# Altium PCB all.PcbDoc
Units mil, origin at the board's own origin, x right, y up, seen from the top; angles counter-clockwise.
Board outline 2164.03 x 2479.49 mil, 2 copper layers (Top Layer, Bottom Layer); 19 components, 43 nets, 160 pads, 23 vias.
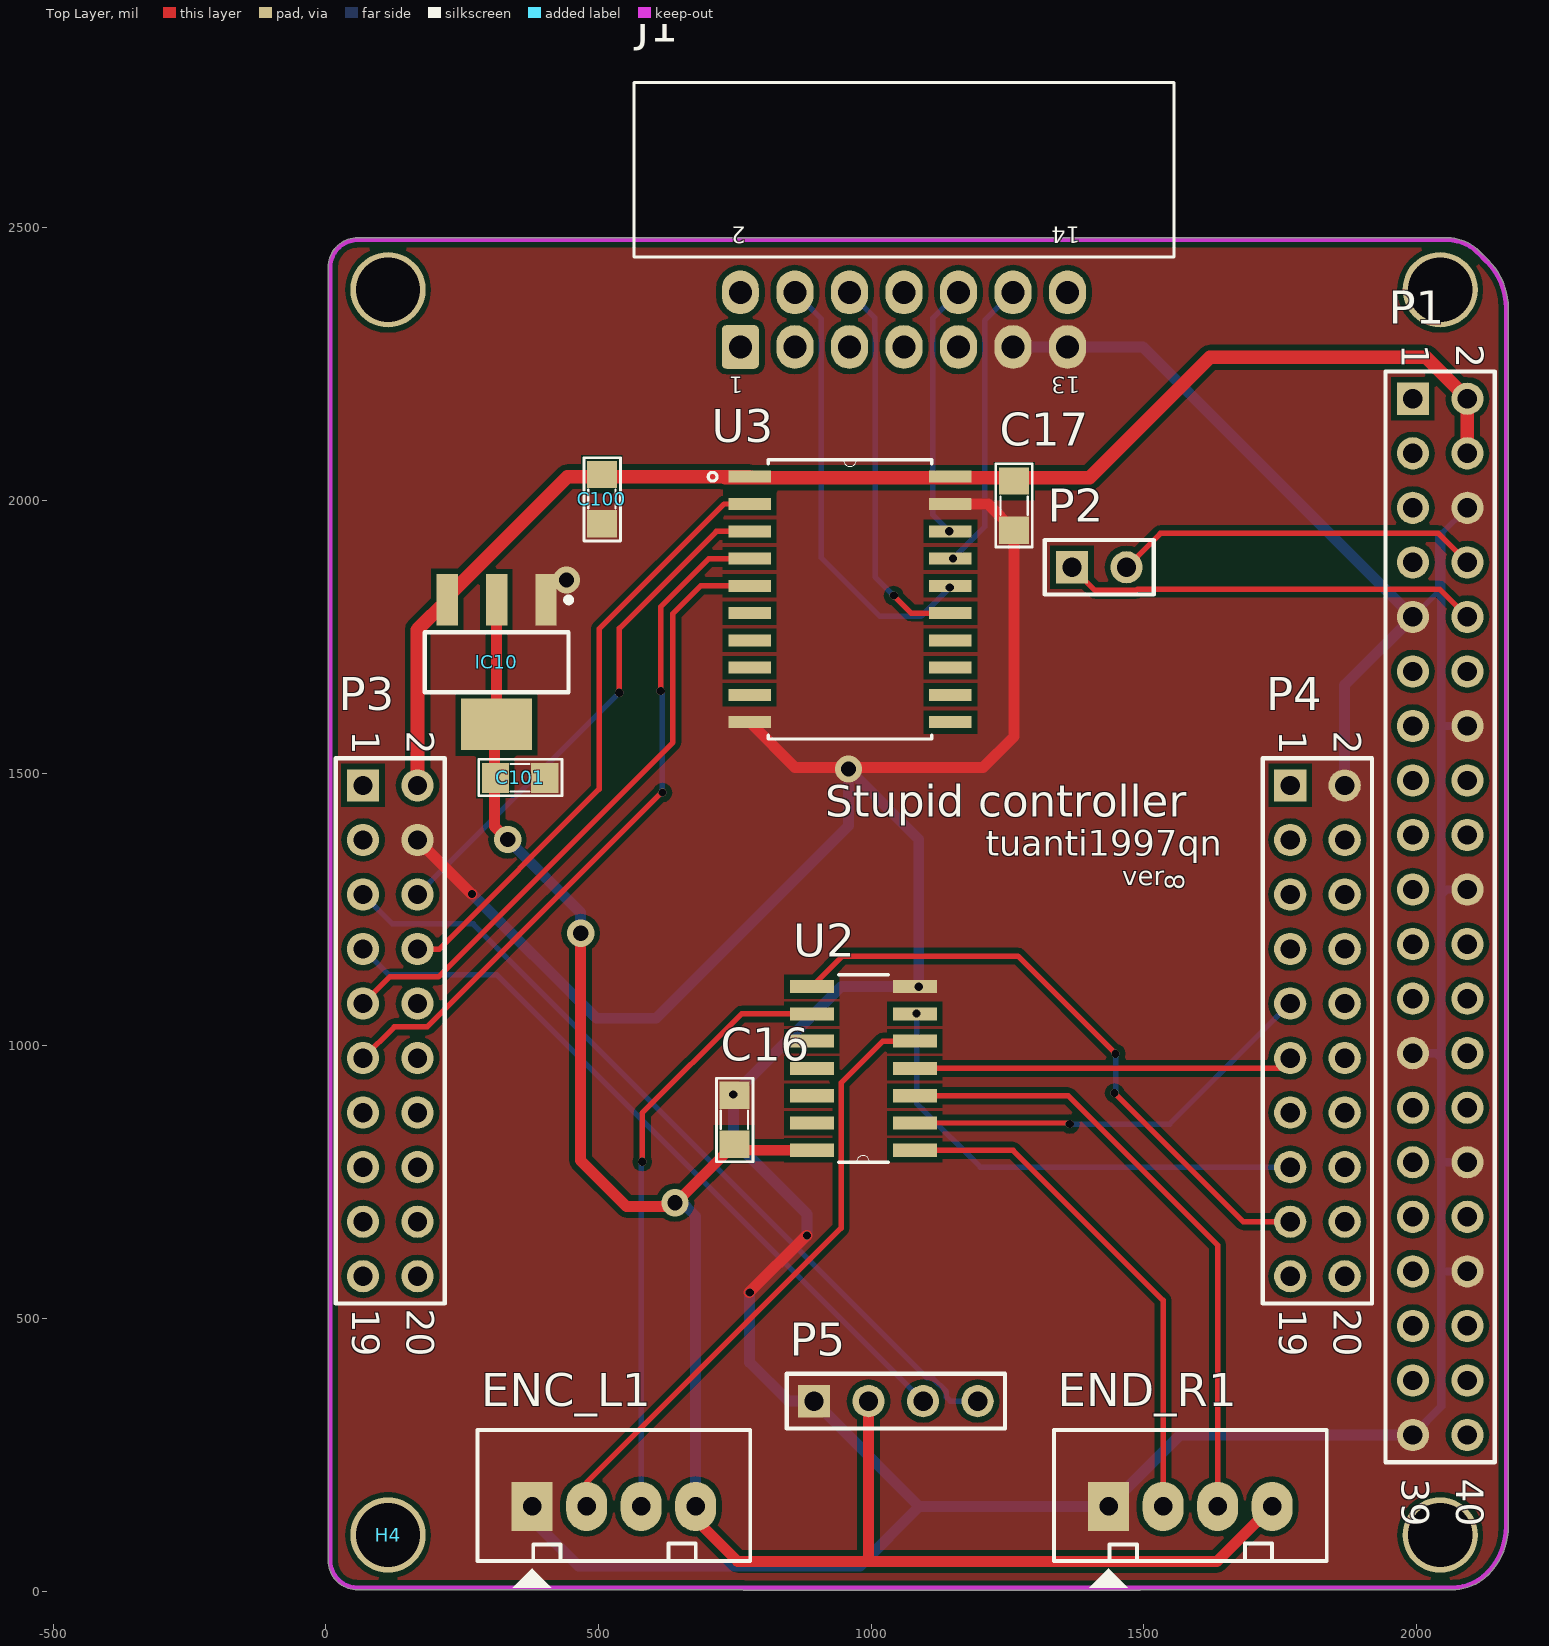
[diagram p0: Top Layer view]
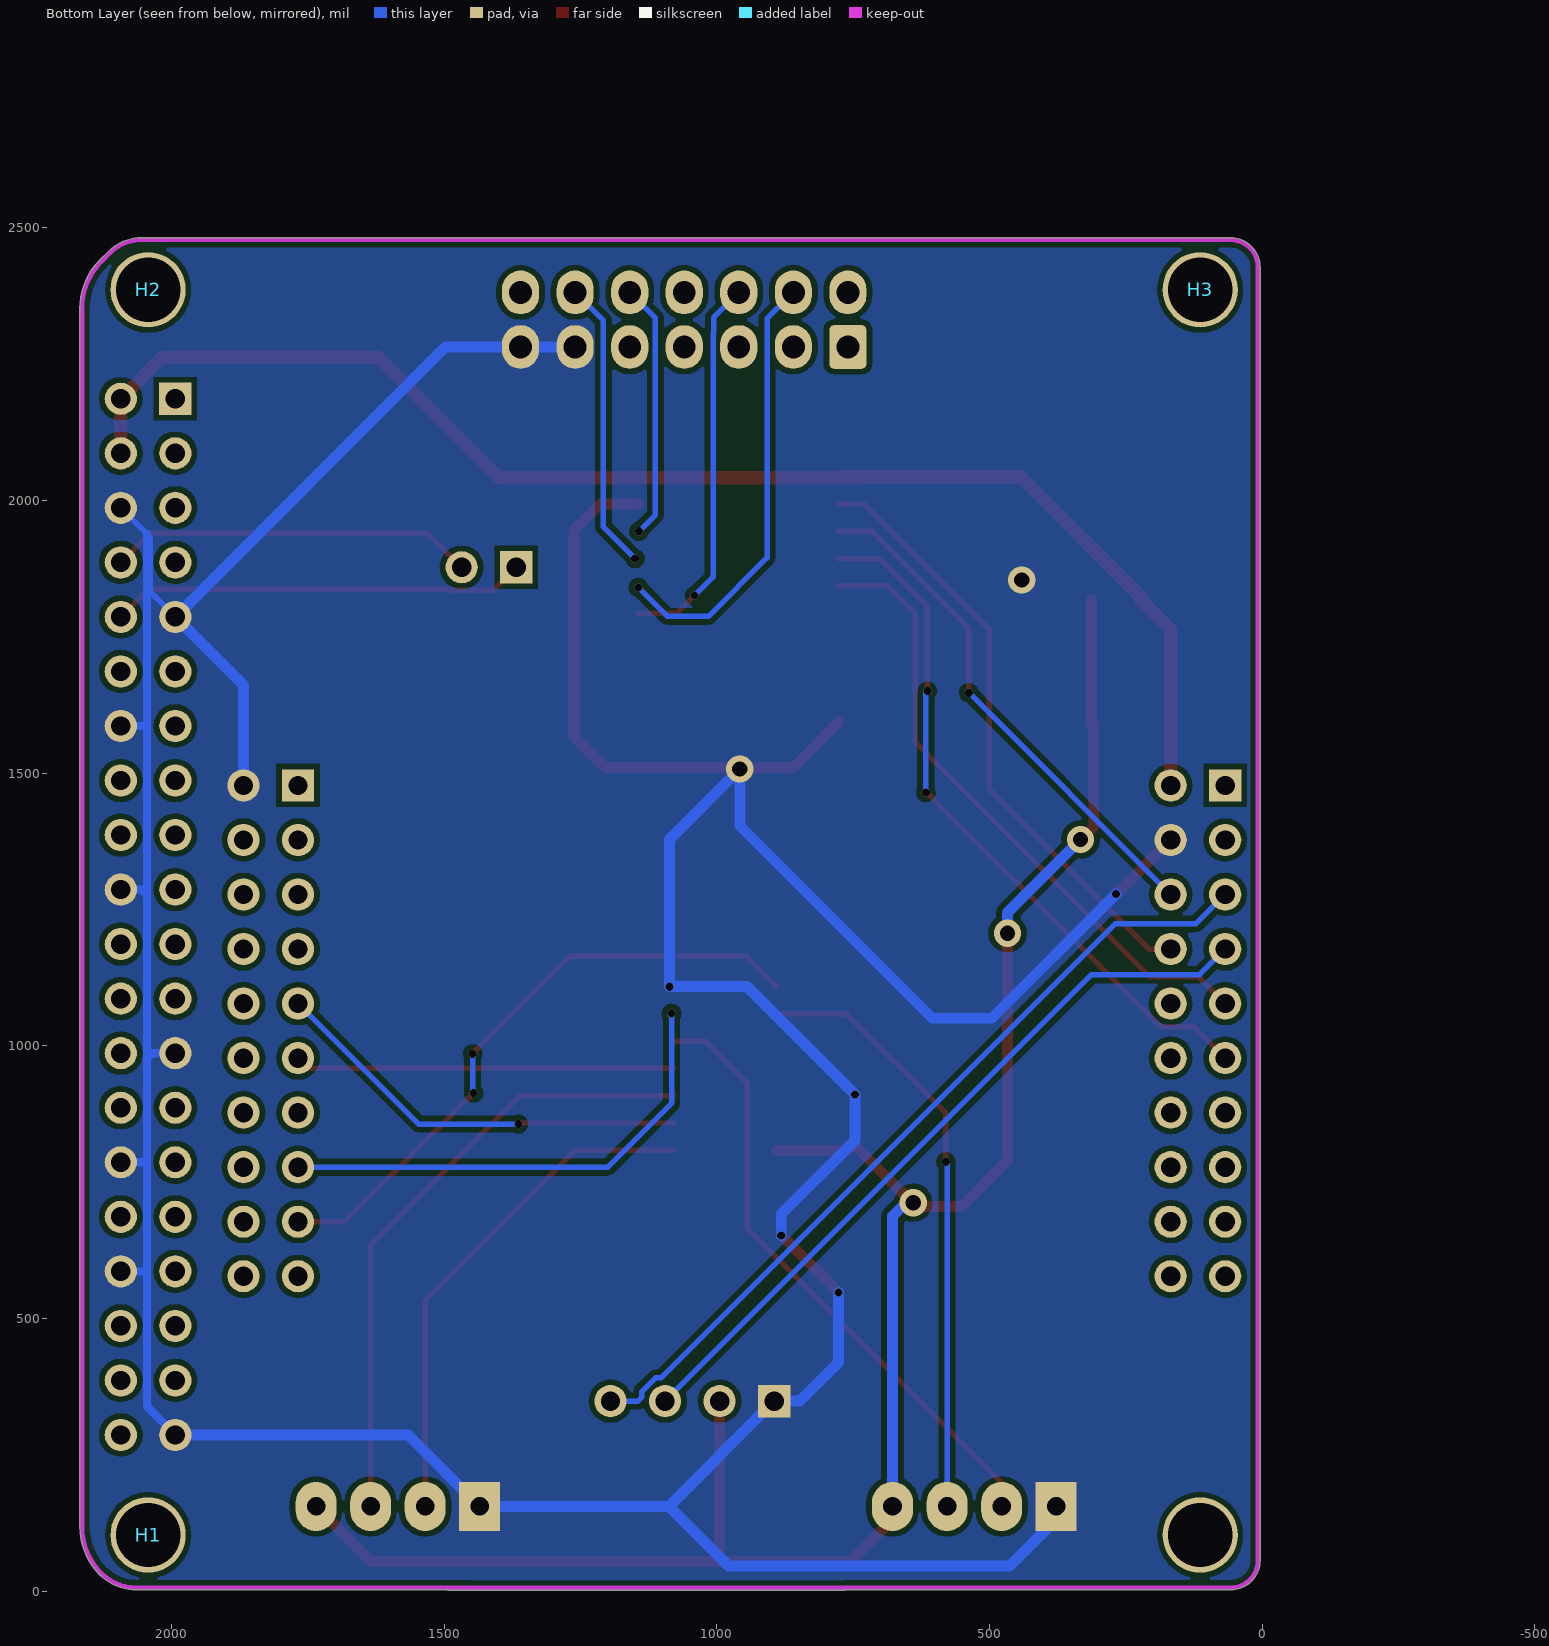
[diagram p1: Bottom Layer view, seen from below]
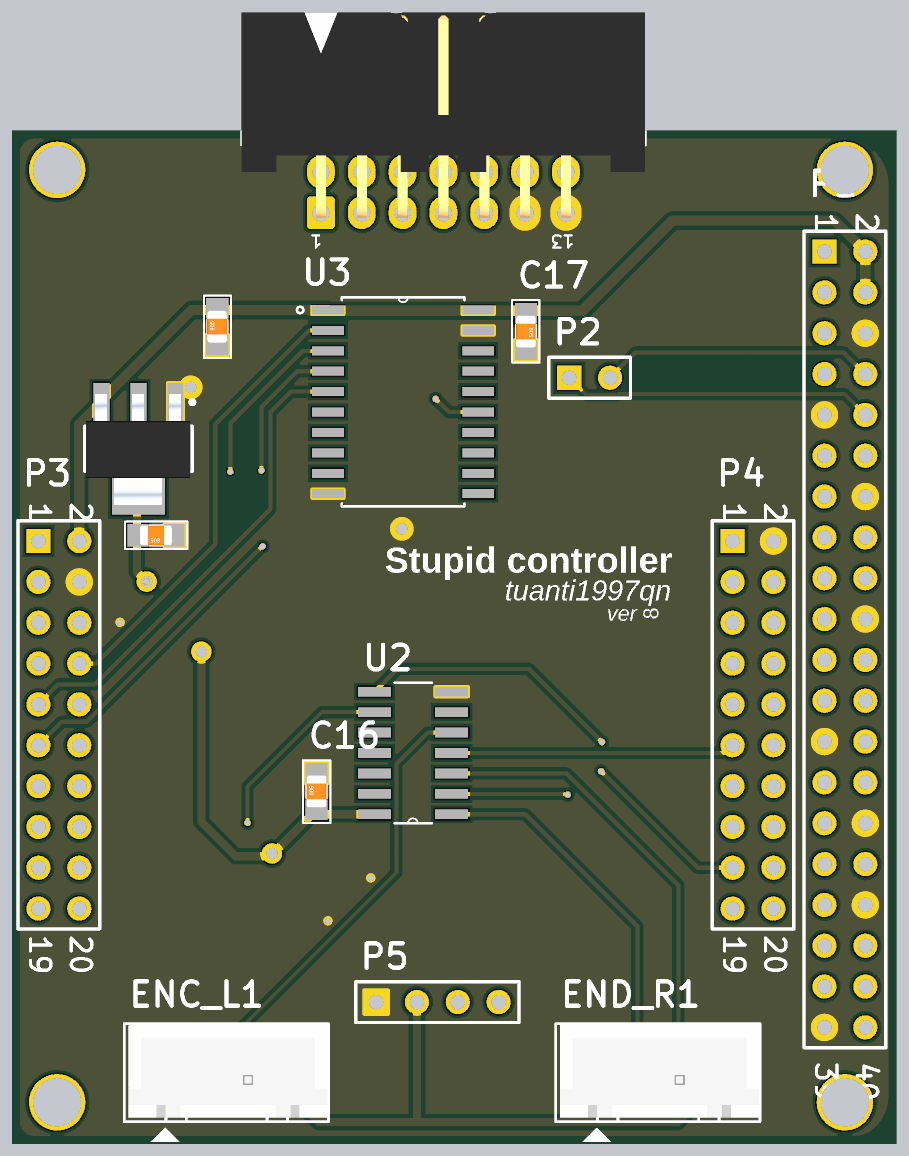
[diagram p2: 3D render of the assembled board from above, using the file's embedded part models]

## Layer stack, top to bottom
Top Solder: solder mask 0.4, Solder Resist, Dk 3.5
Top Layer: signal copper 1.4
Dielectric 1: dielectric 12.6, FR-4, Dk 4.8
Bottom Layer: signal copper 1.4
Bottom Solder: solder mask 0.4, Solder Resist, Dk 3.5

## Board outline
764.13,2.45 ccw(c766,6) 766,1.98 1492,1.98 ccw(c1492,6) 1493.87,2.45 2064.32,2.45 ccw(c2064.32,97.44) 2131.48,30.27 ccw(c2043.29,118.46) 2168.02,118.46 2168.02,2352.46 ccw(c2043.29,2352.46) 2131.48,2440.66 ccw(c2128.64,2437.82) 2131.47,2440.67 2131.48,2440.66 2114.84,2457.3 ccw(c2056.47,2398.94) 2056.47,2481.48 58,2481.48 ccw(c58,2427.46) 3.99,2427.46 3.99,56.46 ccw(c58,56.46) 58,2.45

## Design rules (kind name [scope] priority, off if disabled: settings)
Clearance [All] p1: gap=8 ignorepadtopadclearanceinfootprint=FALSE except(0: Arc-Hole Track-Hole SMDPad-Hole THPad-Hole Via-Hole Fill-Hole Poly-Hole Region-Hole Text-Hole; 10: Arc-Fill Arc-Poly Arc-Region Track-Fill Track-Poly Track-Region SMDPad-Fill SMDPad-Poly SMDPad-Region THPad-Fill THPad-Poly THPad-Region Via-Fill Via-Poly Via-Region Fill-Fill Fill-Poly Fill-Region Poly-Poly Poly-Region Region-Region)
PlaneConnect [All] p1: planeconnectstyle=Direct reliefexpansion=20 reliefentries=4 reliefconductorwidth=10 reliefairgap=10
PolygonConnect [All] p1: connectstyle=Direct reliefconductorwidth=10 reliefentries=4 polygonreliefangle="90 Angle" airgapwidth=10
RoutingVias [All] p1: holewidth=28 width=50 viastyle="Through Hole" minholewidth=8 minwidth=8 maxholewidth=15 maxwidth=12
SolderMaskExpansion [All] p1: expansion=4
Width [All] p1: maxlimit=25 minlimit=8 preferedwidth=10
29 further rules are at their usual default settings.

## Classes and differential pairs
component class dh: R8 R9 R10 R11

## Components (designator, comment, footprint, x,y, rotation, side; value= is the part's Value field where it differs from the comment)
C16 "Cap Non-Pol SMD" CAP-SM-0805 749,819.46 r90 top value=100pF
C17 "Cap Non-Pol SMD" CAP-SM-0805 1262,2035.46 r270 top value=100pF
C100 "Cap Non-Pol SMD" CAP-SM-0805 506,1957.46 r90 top value=100pF
C101 "Cap Non-Pol SMD" CAP-SM-0805 401,1491.46 r180 top value=100pF
ENC_L1 "ENC_L" CON4 378,155.46 r0 top value="Connector 4"
END_R1 "END_R" CON4 1435,155.46 r0 top value="Connector 4"
H1 "Hole" "LO KHOAN 3MM"#1 2181.87,978 r180 bottom
H2 "Hole" "LO KHOAN 3MM"#2 2043,2386.46 r180 bottom
H3 "Hole" "LO KHOAN 3MM"#3 613.87,963 r180 bottom
H4 "Hole" "LO KHOAN 3MM"#2 113.87,103 r0 top
IC10 "LM1117" SOT223-4N 313,1703.46 r270 top value=LM317
J1 "shrouded box header" 14P_PCB_HEADER_BRD_MNT_RA 1059.87,2331.46 r90 top value="Double-row, 14 positions"
P1 "Header 20X2" HDR2X20 1993,2186.46 r270 top
P2 "Header 2" HDR1X2 1368,1877.46 r0 top
P3 "Header 10X2" HDR2X10 68,1477.46 r270 top locked
P4 "Header 10X2" HDR2X10 1768,1477.46 r270 top locked
P5 "Header 4" HDR1X4 895,348.46 r0 top
U2 "SN74HC14DR" *SOIC127P600X175-14N 891,1108.46 r180 top
U3 "SN74HC245DWR" *SOIC127P1030X265-20N 961,1818.46 r0 top

## Footprints (in the part's own frame and the unit in brackets; to place one, negate y for a bottom-side part, rotate by r counter-clockwise, add the part's x,y. Pads: shape width x height; smd on the part's side, far side on the other; paste and mask are expansions set on the pad)
14P_PCB_HEADER_BRD_MNT_RA [mil] "HEADER BRD MNT R/A 14POS 2.54MM"
  round 40 on Mech15: 0(0,0) 0(460,0)
  rrect25% 80x68 hole 42: 1(-50,300)
  oval 80x68 hole 42: 2(50,300) 3(-50,200) 4(50,200) 5(-50,100) 6(50,100) 7(-50,0) 8(50,0) 9(-50,-100) 10(50,-100) 11(-50,-200) 12(50,-200) 13(-50,-300) 14(50,-300)
  silkscreen extent 115,-495 435,495, body extent -62,-494 440,494, height 340
*SOIC127P600X175-14N [mil]
  rect 81x24 smd: 1(-189,300) 2(-189,250) 3(-189,200) 4(-189,150) 5(-189,100) 6(-189,50) 7(-189,0) 8(0,0) 9(0,50) 10(0,100) 11(0,150) 12(0,200) 13(0,250) 14(0,300)
  silkscreen extent -140,-22 -49,322
*SOIC127P1030X265-20N [mil]
  rect 78x22 smd: 1(-184,225) 2(-184,175) 3(-184,125) 4(-184,75) 5(-184,25) 6(-184,-25) 7(-184,-75) 8(-184,-125) 9(-184,-175) 10(-184,-225) 11(184,-225) 12(184,-175) 13(184,-125) 14(184,-75) 15(184,-25) 16(184,25) 17(184,75) 18(184,125) 19(184,175) 20(184,225)
  silkscreen extent -260,-256 150,256
CAP-SM-0805 [mil]
  rect 50x55 smd: 1(0,0) 2(90,0)
  silkscreen extent -32,-34 121,33, body extent 6,-25 84,25, height 31
CON4 [mil]
  rect 75x90 hole 34: 1(0,0)
  oval 75x90 hole 34: 2(100,0) 3(200,0) 4(300,0)
  silkscreen extent -100,-149 400,140, body extent -90,-90 398,136, height 276
HDR1X2 [mm] "Connector; Header; 2 Position"
  rect 1.5x1.5 hole 0.9: 1(0,0)
  round 1.5 hole 0.9: 2(2.54,0)
  silkscreen extent -1.27,-1.27 3.81,1.27
HDR1X4 [mm] "Connector; Header; 4 Position"
  rect 1.5x1.5 hole 0.9: 1(0,0)
  round 1.5 hole 0.9: 2(2.54,0) 3(5.08,0) 4(7.62,0)
  silkscreen extent -1.27,-1.27 8.89,1.27
HDR2X10 [mm] "Connector; Header; 10x2 Position"
  rect 1.5x1.5 hole 0.9: 1(0,0)
  round 1.5 hole 0.9: 2(0,2.54) 3(2.54,0) 4(2.54,2.54) 5(5.08,0) 6(5.08,2.54) 7(7.62,0) 8(7.62,2.54) 9(10.16,0) 10(10.16,2.54) 11(12.7,0) 12(12.7,2.54) 13(15.24,0) 14(15.24,2.54) 15(17.78,0) 16(17.78,2.54) 17(20.32,0) 18(20.32,2.54) 19(22.86,0) 20(22.86,2.54)
  silkscreen extent -1.27,-1.27 24.13,3.81
HDR2X20 [mm] "Connector; Header; 20x2 Position"
  rect 1.5x1.5 hole 0.9: 1(0,0)
  round 1.5 hole 0.9: 2(0,2.54) 3(2.54,0) 4(2.54,2.54) 5(5.08,0) 6(5.08,2.54) 7(7.62,0) 8(7.62,2.54) 9(10.16,0) 10(10.16,2.54) 11(12.7,0) 12(12.7,2.54) 13(15.24,0) 14(15.24,2.54) 15(17.78,0) 16(17.78,2.54) 17(20.32,0) 18(20.32,2.54) 19(22.86,0) 20(22.86,2.54) 21(25.4,0) 22(25.4,2.54) 23(27.94,0) 24(27.94,2.54) 25(30.48,0) 26(30.48,2.54) 27(33.02,0) 28(33.02,2.54) 29(35.56,0) 30(35.56,2.54) 31(38.1,0) 32(38.1,2.54) 33(40.64,0) 34(40.64,2.54) 35(43.18,0) 36(43.18,2.54) 37(45.72,0) 38(45.72,2.54) 39(48.26,0) 40(48.26,2.54)
  silkscreen extent -1.27,-1.27 49.53,3.81
"LO KHOAN 3MM"#1 [mil]
  round 138 hole 118.1: 1(138.87,-875)
"LO KHOAN 3MM"#2 [mil]
  round 138 hole 118.1: 1(0,0)
"LO KHOAN 3MM"#3 [mil]
  round 138 hole 118.1: 1(500,1423.46)
SOT223-4N [mm] "SOT223, 4-Leads, Body 6.5x3.5mm, Pitch 2.3mm, Lead Span 7mm, IPC Medium Density"
  rect 2.4x1 smd: 1(-2.9,2.3) 2(-2.9,0) 3(-2.9,-2.3)
  rect 2.4x3.3 smd: 4(2.9,0)
  silkscreen extent -3.02,-3.35 1.4,3.48, body extent -3.39,-3.27 3.5,3.23, height 1.72

## Part data
C16 C17 C100 C101: "Capacitor"
ENC_L1 END_R1: library part Con4, "Connector 4"
H1 H2 H3 H4: "Hole 3mm"
IC10: "Available in 1.8V, 2.5V, 2.85V, 3.3V, 5V, and  Adjustable Versions"
J1: library part CONN_HEADER_2x7P_RA_0.100in_Male, "Header THD 14 POS Double-row right-angle 2.54mm pitch", Manufacturer 1=3M, Manufacturer Part Number 1=D2514-5002-AR, Package / Case="Connector header; 2.54mm pitch", Supplier Part Number 1=MHE14E-ND, ComponentLink1Description=http://multimedia.3m.com/mws/mediawebserver?66666UuZjcFSLXTtm8T_oxMcEVuQEcuZgVs6EVs6E666666--, ComponentLink1URL=http://multimedia.3m.com/mws/mediawebserver?66666UuZjcFSLXTtm8T_oxMcEVuQEcuZgVs6EVs6E666666--, Connector Type="Header, Shrouded", Contact Mating Length="0.243\" (6.17mm)", Contact Type="Male Pin", Number of Positions=14, Number of Rows=2, Pitch="0.100\" (2.54mm)", QtyOverride=1, Row Spacing="0.100\" (2.54mm)", SCDType=source, Supplier 1=Digi-Key
P1: "Header, 20-Pin, Dual row", LatestRevisionDate=17-Jul-2002, LatestRevisionNote="Re-released for DXP Platform.", Publisher="Altium Limited"
P2: "Header, 2-Pin", LatestRevisionDate=17-Jul-2002, LatestRevisionNote="Re-released for DXP Platform.", Publisher="Altium Limited"
P3 P4: "Header, 10-Pin, Dual row", LatestRevisionDate=17-Jul-2002, LatestRevisionNote="Re-released for DXP Platform.", Publisher="Altium Limited"
P5: "Header, 4-Pin", LatestRevisionDate=17-Jul-2002, LatestRevisionNote="Re-released for DXP Platform.", Publisher="Altium Limited"
U2: "Inverter Schmitt Trigger 6-Element CMOS 14-Pin SOIC T/R", Package="SOIC-14 Texas Instruments", Availability=Unavailable, MF="Texas Instruments", MP=SN74HC14DR, Price=None, SnapEDA_Link=https://www.snapeda.com/parts/SN74HC14DR/Texas%20Instruments/view-part/?ref=snap
U3: "Logic IC - Receiver, transceiver Texas Instruments SN74HC245DWR SOIC 20", Package="SOIC-20 Texas Instruments", Availability=Unavailable, MF="Texas Instruments", MP=SN74HC245DWR, Price=None, SnapEDA_Link=https://www.snapeda.com/parts/SN74HC245DWR/Texas%20Instruments/view-part/?ref=snap

## Via types
v1: diameter 15, hole 15, Top Layer to Bottom Layer, 18 vias
v2: diameter 50, hole 28, Top Layer to Bottom Layer, 5 vias

## Nets (pads, with @x,y where several pads share a name; then routed paths per layer and width w, separated by ;. In a path a pad name is that pad's centre, name@x,y a point inside that pad or via, vN(x,y) a via of type N, cw(c..) or ccw(c..) an arc to the next point about the centre after c; other vN are vias at no path point)
3V3: C16.1 C101.2 ENC_L1.4 END_R1.4 IC10.2 IC10.4 P5.2 U2.14 | length 3650.7
  Top Layer w20: IC10.4@309,1590.46 309,1589.29 309,1402.46 v1(333,1378.46) ; IC10.4 IC10.2 ; v2(467,1206.46) 467,789.46 551,705.46 635,705.46 C16.1 760,808.46 U2.14 ; ENC_L1.4 678,131.46 755,54.46 995,54.46 ; P5.2 995,54.46 ; END_R1.4 1634,54.46 995,54.46
  Bottom Layer w20: v2(333.26,1378.2) 467,1244.46 v2(467,1206.46) ; v2@649,716.46 678,687.46 ENC_L1.4 ENC_L1.4@678,131.46
  other v2: 640,712.46
+5: C17.1 C100.2 IC10.3 P1.2 P1.4 P3.2 U3.1 U3.20 | length 2598
  Top Layer w25: P3.2 168,1763.19 IC10.3 222.45,1823.01 442.91,2043.46 U3.1 ; 732,2041.46 1400,2041.46 1621,2262.46 2017,2262.46 P1.2 P1.4
ADC: 
BTN1: 
BTN2: 
BTN3: 
EN0_A: ENC_L1.2 U2.5 | length 1160.9
  Top Layer w10: ENC_L1.2@478,131.46 ENC_L1.2 478,199.07 944.5,665.57 944.5,931.96 1021,1008.46 U2.5
EN0_B: ENC_L1.3 U2.9 | length 1108.2
  Top Layer w10: v1(580,787.46) 580,876.46 762,1058.46 U2.9
  Bottom Layer w10: ENC_L1.3 578,785.46 v1(580,787.46)
EN1_A: END_R1.2 U2.1 | length 984.4
  Top Layer w10: U2.1 1260,808.46 1535,533.46 END_R1.2
  Bottom Layer w10: END_R1.2@1535,118 END_R1.2
EN1_B: END_R1.3 U2.3 | length 1147.5
  Top Layer w10: U2.3 1361,908.46 1635,634.46 END_R1.3
GND: C16.2 C17.2 C100.1 C101.1 ENC_L1.1 END_R1.1 IC10.1 J1.11 J1.13 P1.6 P1.9 P1.14 P1.20 P1.25 P1.30 P1.34 P1.39 P3.4 P4.2 P5.1 U2.7 U3.10 U3.19 | length 9387.3
  Top Layer w20: P3.4 267,1278.46 v1(268,1278.46) ; v1(777,547.46) 776,547.46 881,652.46 v1(882,652.46) ; U3.10 860,1510.46 1205,1510.46 1262,1567.46 C17.2@1262,1943.46 ; U2.7 v1(1087,1108.46) ; U3.19 1214,1993.46 C17.2
  Bottom Layer w10: END_R1.1@1405,125.46 END_R1.1 ; P1.9 2039,1832.46 2039,1932.46 2045,1938.46 P1.6
  Bottom Layer w15: P1.39 2045,338.46 2045,581.46 ; P1.25 2035,986.46 2045,976.46 ; 2045,1938.46 2045,1585.46 ; P1.34 2050,586.46 2045,581.46 ; P1.30 2047,786.46 2045,788.46 ; P1.20 2055,1286.46 2045,1276.46 ; P1.14 2046,1586.46 2045,1585.46 ; 2045,581.46 2045,788.46 ; 2045,788.46 2045,976.46 ; 2045,976.46 2045,1276.46 ; 2045,1276.46 2045,1585.46
  Bottom Layer w20: v1(268,1278.46) 496,1050.46 605,1050.46 958,1403.46 v2(958,1507.46) 1087,1378.46 v1(1087,1108.46) 945,1108.46 v1(747,910.46) 747,826.46 882,691.46 v1(882,652.46) ; ENC_L1.1@378,131.46 463,46.46 979,46.46 1088,155.46 ; v1(777,547.46) 777,419.46 848,348.46 P5.1 1088,155.46 ; J1.11 J1.13 1498,2281.46 P1.9 1868,1661.46 P4.2 ; P1.39 1566,286.46 END_R1.1 1088,155.46
  other v2: 441,1854
H-BRG_/RSTAB: J1.6 U3.15 | length 706.9
  Top Layer w10: v1(1041,1825.46) 1073,1793.46 U3.15
  Bottom Layer w10: J1.6 1006,2335.33 1006,2308.66 1006.87,2307.8 1006.87,1859.6 v1(1041,1825.46)
H-BRG_/RSTCD: J1.12 U3.17 | length 533.5
  Bottom Layer w10: v1(1150,1893.46) 1208,1951.46 1208,2329.6 J1.12
H-BRG_PWMA: J1.4 U3.16 | length 808.8
  Bottom Layer w10: J1.4 908,2333.33 908,1895.17 1015.71,1787.46 1091,1787.46 v1(1144,1840.46)
H-BRG_PWMC: J1.10 U3.18 | length 471.9
  Top Layer w10: v1(1143,1943.46) U3.18
  Bottom Layer w10: v1(1143,1943.46) 1112.87,1973.6 1112.87,2334.46 J1.10
MFP: 
Net1_17: 
Net2_1: 
Net2_2: 
NetC1_1: 
NetC1_2: 
NetC2_1: 
NetC2_2: 
NetC4_2: 
NetC7_2: 
NetC8_2: 
NetC15_2: 
NetR8_2: 
PWM_A: P3.11 U3.4 | length 1292.4
  Top Layer w10: P3.11 125.47,1034.94 185.62,1034.94 615.14,1464.46 v1(617,1464.46) ; v1(614,1650.46) 614,1805.46 702,1893.46 U3.4
  Bottom Layer w10: v1(614,1650.46) 617,1647.46 v1(617,1464.46)
PWMC: P3.8 U3.2 | length 1119.2
  Top Layer w10: P3.8 208,1177.46 501,1470.46 501,1764.46 730,1993.46 U3.2
QEI0_A: P4.15 U2.6 | length 902.7
  Bottom Layer w10: v1@1086,1056.46 v1(1083,1059.46) 1083,894.46 1094,883.46 1200,777.46 P4.15
QEI0_B: P4.17 U2.8 | length 1146.9
  Top Layer w10: U2.8 947,1164.46 1269,1164.46 v1(1448,985.46) ; v1(1446,913.46) 1682,677.46 P4.17
  Bottom Layer w10: v1(1446,913.46) 1448,915.46 v1(1448,985.46)
QEI1_A: P4.9 U2.2 | length 780.4
  Top Layer w10: U2.2 1362,858.46 v1(1364,856.46)
  Bottom Layer w10: v1(1364,856.46) 1547,856.46 P4.9
QEI1_B: P4.11 U2.4 | length 695.9
  Top Layer w10: U2.4 1749,958.46 P4.11
RAS_RX: P1.10 P2.1 | length 764.8
  Top Layer w10: P2.1 1410.53,1834.94 1485.62,1834.94 1488.14,1837.46 2042,1837.46 P1.10
RAS_TX: P1.8 P2.2 | length 672.6
  Top Layer w10: P2.2 1530,1939.46 2040,1939.46 P1.8
RST_AB: P3.9 U3.5 | length 1164.5
  Top Layer w10: P3.9 117,1126.46 206,1126.46 636,1556.46 636,1792.46 687,1843.46 U3.5
RST_CD: P3.6 U3.3 | length 954
  Top Layer w10: v1(538,1647.46) 538,1765.46 716,1943.46 U3.3
  Bottom Layer w10: P3.6 v1(538,1647.46)
SCL: 
SDA: 
TM4_U1RX: P3.5 P5.4 | length 1517.7
  Bottom Layer w10: P3.5 122,1223.46 270,1223.46 1102.47,390.99 1112.62,390.99 1137.53,366.08 1137.53,355.94 1145,348.46 P5.4
TM4_U1TX: P3.7 P5.3 | length 1370.4
  Bottom Layer w10: P3.7 115,1130.46 313,1130.46 P5.3
VCC_IN: 
pads on no net: H1.1 H2.1 H3.1 H4.1 J1.0 J1.1 J1.2 J1.3 J1.5 J1.7 J1.8 J1.9 J1.14 P1.1 P1.3 P1.5 P1.7 P1.11 P1.12 P1.13 P1.15 P1.16 P1.17 P1.18 P1.19 P1.21 P1.22 P1.23 P1.24 P1.26 P1.27 P1.28 P1.29 P1.31 P1.32 P1.33 P1.35 P1.36 P1.37 P1.38 P1.40 P3.1 P3.3 P3.10 P3.12 P3.13 P3.14 P3.15 P3.16 P3.17 P3.18 P3.19 P3.20 P4.1 P4.3 P4.4 P4.5 P4.6 P4.7 P4.8 P4.10 P4.12 P4.13 P4.14 P4.16 P4.18 P4.19 P4.20 U2.10 U2.11 U2.12 U2.13 U3.6 U3.7 U3.8 U3.9 U3.11 U3.12 U3.13 U3.14

## Polygon pours and split planes (outlines as drawn)
GND on Top Layer (solid, remove dead copper, pour order 14): -251,2630 -236,2645 2531,2645 2531,-152 2447,-236 2423,-212 -271,-212 -271,2550 -263,2558
GND on Bottom Layer (solid, remove dead copper, pour order 16): -267,2653 -164,2756 2655,2756 2655,-199 2353,-501 2207,-355 -220,-355 -220,2275 -404,2459

## Keep-outs
Keep-Out Layer:
  lines w8: 766,6 1492,6 ; 766,6.46 124,6.46 58,6.46 cw(c58,56.46) 8,56.46 8,104.31 8,2295.46 8,2427.46 cw(c58,2427.46) 58,2477.46 110.77,2477.46 2056.47,2477.46 cw(c2056.47,2398.94) 2112,2454.46 2128.64,2437.82 cw(c2043.29,2352.46) 2164,2352.46 2164,118.46 cw(c2043.29,118.46) 2128.64,33.11 cw(c2064.32,97.44) 2064.32,6.46 1454,6.46

## Other copper
Top Layer:
  region: -451.13,1190
  region: -451.13,1190
  region: -451.13,1190
  region: -451.13,1190

## Silkscreen, mask and mechanical layers (free items; w line width, h text height)
Top Overlay:
  text "Stupid controller" at 916,1400.46 h100
  text "tuanti1997qn" at 1210,1332.46 h80
  text "8" at 1586,1285.46 h60 r90
  text "ver" at 1460,1282.46 h60

## Text inside footprints (layer, text, board x,y; h text height)
J1: Top Overlay "2" at 769.87,2501.46 h30 r180; Top Overlay "1" at 764.87,2226.46 h30 r180; Top Overlay "14" at 1382.87,2501.46 h30 r180; Top Overlay "13" at 1382.87,2226.46 h30 r180
P1: Top Overlay "1" at 1973,2286.46 h50 r270; Top Overlay "2" at 2073,2286.46 h50 r270; Top Overlay "40" at 2073,206.46 h50 r270; Top Overlay "39" at 1973,206.46 h50 r270
P3: Top Overlay "20" at 148,517.46 h50 r270; Top Overlay "19" at 48,517.46 h50 r270; Top Overlay "1" at 48,1577.46 h50 r270; Top Overlay "2" at 148,1577.46 h50 r270
P4: Top Overlay "20" at 1848,517.46 h50 r270; Top Overlay "19" at 1748,517.46 h50 r270; Top Overlay "1" at 1748,1577.46 h50 r270; Top Overlay "2" at 1848,1577.46 h50 r270